# Altium PCB BMS.PcbDoc (part 2 of 2)
Units mil, origin at the board's own origin, x right, y up, seen from the top; angles counter-clockwise.
Board outline 4370 x 2340 mil, 2 copper layers (Top Layer, Bottom Layer); 173 components, 136 nets, 585 pads, 275 vias.
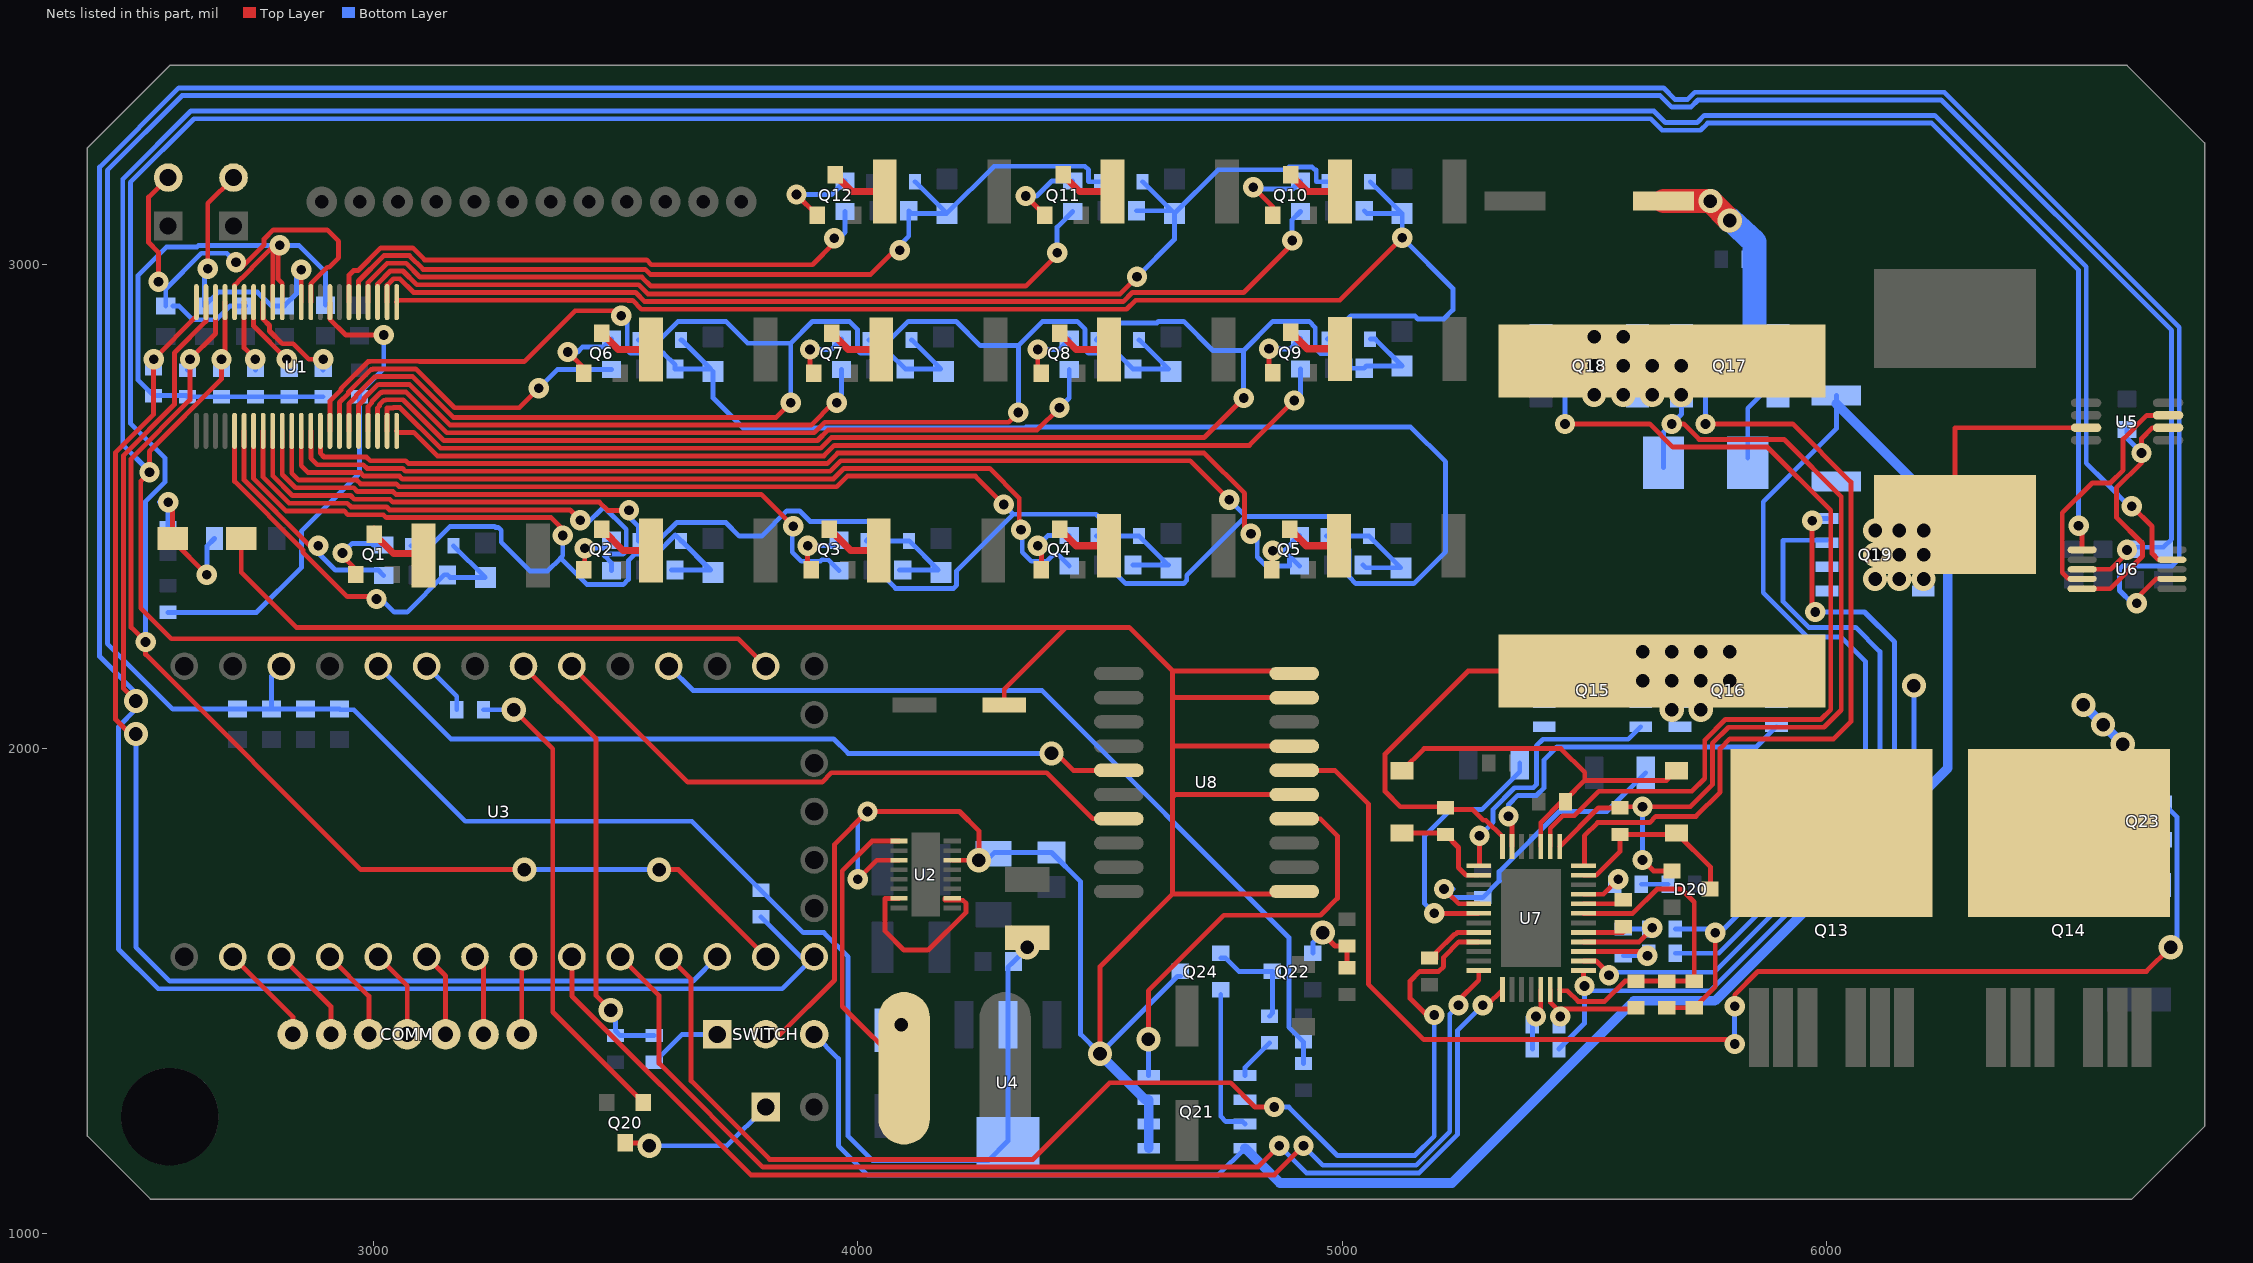
[diagram p2: the nets of this part, all layers, seen from the top]

## Via types
v1: diameter 50, hole 28, Top Layer to Bottom Layer, 130 vias
v2: diameter 42, hole 20, Top Layer to Bottom Layer, 130 vias
v3: diameter 23.62, hole 11.81, Top Layer to Bottom Layer, 15 vias

## Nets (pads, with @x,y where several pads share a name; then routed paths per layer and width w, separated by ;. In a path a pad name is that pad's centre, name@x,y a point inside that pad or via, vN(x,y) a via of type N, cw(c..) or ccw(c..) an arc to the next point about the centre after c; other vN are vias at no path point) (continued)
NetC6_2: C6.2 D5.1 R14.1 U1.5 | length 862.9
  Top Layer w10: U1.5@2713.62,2655.71 2713.62,2551.54 2854.66,2410.49 2854.66,2405.37 2946.45,2313.58 3001.57,2313.58 v2(3006.57,2308.58)
  Bottom Layer w10: v2(3006.57,2308.58) 3016.45,2308.58 3043.35,2281.68 3069.79,2281.68 3146.69,2358.58 R14.1@3153.07,2358.58 3158.5,2353.15 3230.9,2353.15 D5.1@3165.47,2418.58
NetC7_2: C7.2 D5.2 D6.1 R16.1 U1.7 | length 1738
  Top Layer w10: U1.7@2752.99,2655.71 2752.99,2557.19 2819.69,2490.49 2939.79,2490.49 2947.6,2482.68 3021.01,2482.68 3026.87,2476.81 3367.43,2476.81 3391.19,2453.05 v2(3391.19,2439.77)
  Bottom Layer w10: D5.2@3077.67,2418.58 3118.52,2418.58 3158.48,2458.54 3250.58,2458.54 3252.55,2456.58 3257.74,2456.58 3264.13,2450.19 3264.13,2425.9 3323.35,2366.68 3360.06,2366.68 3386.57,2393.18 ; v2(3391.19,2439.77) 3391.19,2397.81 3386.57,2393.18 ; R16.1@3615.68,2368.58 R16.1@3623.07,2368.58 3696.14,2368.58 3636.14,2428.58 D6.1@3635.47,2428.58 3623.24,2440.81 3583.77,2401.34 3540.01,2401.34 3526.57,2387.9 3526.57,2349.26 3515.77,2338.46 3441.29,2338.46 3386.57,2393.18
NetC8_2: C8.2 D6.2 D7.1 R18.1 U1.9 | length 1727.4
  Top Layer w10: U1.9@2792.36,2655.71 2792.36,2562.81 2832.87,2522.3 2952.96,2522.3 2960.77,2514.49 3034.18,2514.49 3040.05,2508.62 3466.65,2508.62 3483.61,2491.66 v2(3527.94,2491.66)
  Bottom Layer w10: v2(3527.94,2491.66) 3527.94,2477.22 3547.67,2457.48 D6.2@3547.67,2428.58 3588.52,2428.58 3626.51,2466.58 3727.74,2466.58 3755.73,2438.58 3801.45,2438.58 3853.35,2490.49 3879.79,2490.49 3901.69,2468.58 4024.62,2468.58 4064.62,2428.58 D7.1@4105.47,2428.58 4106.14,2428.58 4166.14,2368.58 R18.1@4093.07,2368.58 R18.1@4085.68,2368.58
NetC9_2: C9.2 D7.2 D8.1 R20.1 U1.11 | length 2544.1
  Top Layer w10: U1.11@2831.73,2655.71 2831.73,2568.43 2846.04,2554.11 2966.14,2554.11 2973.95,2546.3 3047.36,2546.3 3053.23,2540.43 3956.46,2540.43 3978.28,2562.24 4242.91,2562.24 v2(4301.57,2503.58)
  Bottom Layer w10: D7.2@4025.68,2428.58 D7.2@4017.67,2428.58 4027.67,2438.58 4032.13,2438.58 4061.57,2409.14 4061.57,2347.25 4078.23,2330.59 4197.74,2330.59 4204.13,2336.98 4204.13,2366.74 4320.97,2483.58 ; v2(4301.57,2503.58) 4301.57,2502.98 4320.97,2483.58 ; R20.1@4568.07,2378.58 4641.14,2378.58 4581.14,2438.58 D8.1@4580.47,2438.58 4536.84,2438.58 4491.84,2483.58 4320.97,2483.58
NetC10_2: C10.2 D8.2 D9.1 R22.1 U1.13 | length 2945.2
  Top Layer w10: U1.13@2871.1,2655.71 2871.1,2599.06 2884.23,2585.92 2979.31,2585.92 2987.13,2578.11 3060.54,2578.11 3066.4,2572.24 3943.29,2572.24 3965.1,2594.06 4686.1,2594.06 v2(4766.57,2513.58)
  Bottom Layer w10: D8.2@4492.67,2438.58 4514.34,2438.58 4514.34,2422.14 4533.7,2402.79 4533.7,2360.13 4553.23,2340.59 4672.74,2340.59 4679.13,2346.98 4679.13,2357.58 4800.85,2479.3 ; v2(4766.57,2513.58) 4800.85,2479.3 ; R22.1@5043.07,2378.58 5048.5,2373.15 5120.9,2373.15 D9.1@5055.47,2438.58 5011.84,2438.58 4971.12,2479.3 4800.85,2479.3
NetC11_2: C11.2 D9.2 D10.1 R24.1 U1.15 | length 3255.6
  Top Layer w10: U1.15@2910.47,2655.71 2910.47,2717.09 2933.14,2739.77 2933.14,2742.68 2989.05,2798.58 2991.96,2798.58 2992.83,2799.45 3094.35,2799.45 3095.21,2798.58 3311.57,2798.58 3416.57,2903.58 3501.57,2903.58 v2(3511.57,2893.58)
  Bottom Layer w10: v2(3511.57,2893.58) 3524.37,2880.79 3524.37,2822.73 3530.75,2816.34 3598.81,2816.34 3623.07,2792.09 R24.1@3623.07,2783.58 3696.14,2783.58 3636.14,2843.58 D10.1@3635.47,2843.58 ; C11.2@3701.57,2778.15 3701.57,2723.58 3763.48,2661.68 4344.79,2661.68 4346.69,2663.58 5141.57,2663.58 5213.48,2591.68 5213.48,2406.33 5147.74,2340.59 5028.23,2340.59 5014.44,2354.38 5014.44,2410.71 4986.62,2438.53 4967.72,2438.53 D9.2@4967.67,2438.58
NetC12_2: C12.2 D10.2 D11.1 R26.1 U1.17 | length 1990.1
  Top Layer w10: U1.17@2949.84,2655.71 2949.84,2711.47 2964.96,2726.59 2964.96,2729.5 3002.23,2766.77 3005.14,2766.77 3006,2767.64 3081.17,2767.64 3165.23,2683.58 3831.57,2683.58 v2(3861.57,2713.58)
  Bottom Layer w10: D10.2@3547.67,2843.58 3591.3,2843.58 3629.3,2881.58 3727.74,2881.58 3772.74,2836.58 3861.57,2836.58 ; v2(3861.57,2713.58) 3861.57,2836.58 ; D11.1@4110.47,2843.58 4111.14,2843.58 4171.14,2783.58 R26.1@4098.07,2783.58 4065.31,2816.34 4005.75,2816.34 3999.37,2822.73 3999.37,2865.11 3982.9,2881.58 3906.57,2881.58 3861.57,2836.58
NetC13_2: C13.2 D11.2 D12.1 R28.1 U1.19 | length 2423.3
  Top Layer w10: U1.19@2989.21,2655.71 2989.21,2705.85 2996.77,2713.41 2996.77,2716.33 3015.4,2734.96 3018.32,2734.96 3019.18,2735.83 3067.99,2735.83 3152.05,2651.77 3910.35,2651.77 3932.16,2673.58 4311.57,2673.58 v2(4331.57,2693.58)
  Bottom Layer w10: D11.2@4022.67,2843.58 4066.3,2843.58 4104.3,2881.58 4202.74,2881.58 4252.74,2831.58 4331.57,2831.58 ; v2(4331.57,2693.58) 4331.57,2831.58 ; D12.1@4580.47,2843.58 4581.14,2843.58 4641.14,2783.58 R28.1@4568.07,2783.58 4535.31,2816.34 4475.75,2816.34 4469.37,2822.73 4469.37,2865.11 4452.9,2881.58 4381.57,2881.58 4331.57,2831.58
NetC14_2: C14.2 D12.2 D13.1 R30.1 U1.21 | length 2855.5
  Top Layer w10: U1.21@3028.58,2655.71 3028.58,2703.15 3040.84,2703.15 3041.71,2704.02 3054.82,2704.02 3138.87,2619.96 3923.52,2619.96 3945.33,2641.77 4714.76,2641.77 v2(4796.57,2723.58)
  Bottom Layer w10: D12.2@4492.67,2843.58 4526.57,2877.48 4526.57,2878.58 4617.41,2878.58 4620.4,2881.58 4672.74,2881.58 4732.74,2821.58 4796.57,2821.58 ; v2(4796.57,2723.58) 4796.57,2821.58 ; D13.1@5057.75,2845 5068.42,2845 C14.2@5123.85,2789.57 5049.92,2789.57 R30.1@5045.35,2785 5016.57,2785 5016.57,2803.61 5004.59,2815.59 4955.2,2815.59 4944.44,2826.35 4944.44,2868.73 4931.6,2881.58 4856.57,2881.58 4796.57,2821.58
NetC15_2: C15.2 D13.2 D14.1 R32.1 U1.23 | length 2850
  Top Layer w10: U1.23@3048.26,2921.46 3052.29,2925.49 3524.79,2925.49 3525.31,2924.96 3535.31,2924.96 3553.5,2906.77 4554.75,2906.77 4573.46,2925.49 4995.15,2925.49 v2(5123.85,3054.19)
  Bottom Layer w10: D13.2@4969.96,2845 5017.95,2892.99 5150.02,2892.99 5156.34,2886.68 5209.79,2886.68 5228.48,2905.37 5228.48,2949.57 v2(5123.85,3054.19) C15.2@5123.85,3104.57 ; R32.1@5045.35,3110 5050.78,3104.57 5123.18,3104.57 D14.1@5057.75,3170
NetC16_2: C16.2 D14.2 D15.1 R34.1 U1.25 | length 2354.7
  Top Layer w10: U1.25@3008.89,2921.46 3008.89,2959.44 3035.12,2985.67 3061.41,2985.67 3089.78,2957.3 3547.96,2957.3 3566.68,2938.58 4541.57,2938.58 v2(4576.57,2973.58)
  Bottom Layer w10: R34.1@4575.35,3110 4648.42,3110 4588.42,3170 D15.1@4587.75,3170 ; v2(4576.57,2973.58) 4653.85,3050.87 C16.2@4653.85,3104.57 4743.83,3194.55 4884.08,3194.55 4889.65,3200.12 4938.06,3200.12 4943.63,3194.55 4946.41,3194.55 4946.41,3170 D14.2@4969.96,3170
NetC17_2: C17.2 D15.2 D16.1 R36.1 U1.27 | length 1866.5
  Top Layer w10: U1.27@2969.52,2921.46 2969.52,2965.06 3021.94,3017.48 3074.58,3017.48 3102.95,2989.11 3561.14,2989.11 3571.67,2978.58 4026.57,2978.58 4076.57,3028.58 v2(4086.57,3028.58)
  Bottom Layer w10: v2(4086.57,3028.58) 4086.57,3038.58 4105.35,3057.36 R36.1@4105.35,3110 4110.78,3104.57 C17.2@4183.85,3104.57 ; D16.1@4117.75,3170 4118.42,3170 C17.2@4183.85,3104.57 ; D15.2@4499.96,3170 4476.41,3170 4476.41,3194.55 4468.87,3202.09 4281.37,3202.09 C17.2@4183.85,3104.57
NetC32_1: C32.1 D3.1 U7.2 | length 218.9
  Top Layer w10: D3.1@5123.31,1825.63 5210.12,1825.63 C32.1@5213.31,1822.44 5240,1795.75 5240,1754.07 5255.48,1738.58 U7.2@5281.73,1738.58
NetC32_2: C32.2 L3.1 Q15.1 Q16.3 U7.38 | length 1020.9
  Top Layer w10: U7.38@5330.94,1797.64 5330.94,1817.48 5296.52,1851.91 5291.4,1851.91 5269.21,1874.09 5216.77,1874.09 C32.2@5213.31,1877.56 5210.87,1880 5120,1880 5088.39,1911.61 5088.39,1988.39 5260,2160 L3.1@5660,2160
  other v1: 5680,2080 5740,2080 5620,2140 5680,2140 5740,2140 5800,2140 5620,2200 5680,2200 5740,2200 5800,2200
NetC34_1: C34.1 Q16.1 R53.2 U7.5 | length 645.7
  Top Layer w10: v2(5210,1710) 5240.47,1679.53 U7.5@5281.73,1679.53
  Bottom Layer w10: v2@5229.13,1710 v2(5210,1710) 5227.56,1692.44 C34.1@5290,1692.44 5324.37,1726.81 5323.98,1727.2 5323.98,1746.02 5447.95,1870 5546.46,1870 R53.2@5626.46,1950
NetC35_2: C35.2 D3.2 D19.2 U7.34 | length 809.9
  Top Layer w10: D3.2@5123.31,1954.37 5168.94,2000 5451.5,2000 5500.75,1950.75 5500.75,1934.37 ; U7.34@5409.69,1797.64 5409.69,1847.02 5452.67,1890 C35.2@5460.87,1890 5460.87,1894.49 5500.75,1934.37 ; D19.2@5690,1954.37 5670,1934.37 5500.75,1934.37
NetC36_1: C36.1 U7.24 | length 81.3
  Top Layer w10: U7.24@5498.27,1620.47 C36.1@5579.53,1620.47
NetC36_2: C36.2 U7.27 | length 89.8
  Top Layer w10: U7.27@5498.27,1679.53 5580,1679.53 C36.2@5580,1687.56
NetC37_1: C37.1 R54.2 | length 54.9
  Bottom Layer w10: R54.2@5617.56,1720 C37.1@5672.44,1720
NetC38_1: C38.1 R59.1 U7.22 | length 189.7
  Top Layer w10: U7.22@5498.27,1581.1 5628.9,1581.1 5630,1580 v2(5630,1572.44)
  Bottom Layer w10: C38.1@5580,1572.44 v2(5630,1572.44)
NetC38_2: C38.2 R58.1 U7.23 | length 225.2
  Top Layer w10: U7.23@5498.27,1600.79 5613.23,1600.79 5640,1627.56 v2(5640,1629.94)
  Bottom Layer w10: C38.2@5580,1627.56 5644.49,1627.56 5642.1,1629.94 v2(5640,1629.94)
NetC39_1: C39.1 R56.2 R57.1 U7.19 U7.26 | length 721.1
  Top Layer w10: U7.19@5449.06,1502.36 5451.42,1500 5464.88,1500 5486.78,1478.09 5541.85,1478.09 5583.75,1520 R56.2@5606.69,1520 R57.1@5670,1520 C39.1@5726.69,1520 ; U7.26@5498.27,1659.84 5599.84,1659.84 5650,1710 5700,1710 5726.69,1683.31 C39.1@5726.69,1527.56
NetC40_1: C40.1 D19.1 D20.3 U7.30 | length 394.5
  Top Layer w10: U7.30@5498.27,1738.58 5524.52,1738.58 5573.31,1787.37 C40.1@5573.31,1822.44 5693.19,1822.44 5760,1755.63 5760,1720 D20.3@5750,1710
NetC40_2: C40.2 D4.2 D20.1 L3.2 Q17.1 Q18.3 U7.32 | length 1970.9
  Top Layer w10: U7.32@5449.06,1797.64 5528.98,1877.56 C40.2@5573.31,1877.56 5575.75,1880 v2(5620,1880) 5718.78,1880 5764.09,1925.31 5764.09,2010.82 5797.37,2044.09 5994.51,2044.09 6030,2079.58 6030,2520 5911.91,2638.09 5736.78,2638.09 5704.88,2670 v2(5680,2670) ; v2(5620,1770) 5642.6,1747.4 D20.1@5670.63,1747.4
  Bottom Layer w10: v2(5620,1770) v2(5620,1880) ; D4.2@5662.99,2580 D4.2@5662.99,2590 5662.99,2652.99 v2(5680,2670) 5700.49,2690.49 Q17.1@5700.49,2715 Q17.1@5700.49,2765
  other v1: 5520,2730 5580,2730 5640,2730 5700,2730 5520,2790 5580,2790 5640,2790 5700,2790 5520,2850 5580,2850
NetD1_1: D1.1 L1.2 R10.2 | length 341.9
  Top Layer w10: v2(2576.57,2508.58) 2585.7,2499.45 L1.2@2585.7,2433.58 2585.7,2429.45 v2(2656.57,2358.58)
  Bottom Layer w10: R10.2@2576.57,2456.14 2576.57,2491.02 2559.01,2508.58 v2(2576.57,2508.58) ; v2(2656.57,2358.58) 2656.57,2417.95 D1.1@2672.2,2433.58
NetD2_2: D2.2 L2.1 U2.1 | length 612.8
  Top Layer w10: U2.1@4085.08,1808.9 4029.41,1808.9 3968.09,1747.58 3968.09,1467.57 L2.1@4095.67,1340 L2.1@4095.67,1330
  other v1: 4090,1430
NetJP2_1: COMM.1 U3.6 | length 161.5
  Top Layer w10: COMM.1@3306.48,1410 3306.48,1566.48 U3.6@3310,1570
NetJP2_2: COMM.2 U3.5 | length 167.3
  Top Layer w10: U3.5@3210,1570 3227.74,1552.26 COMM.2@3227.74,1410
NetJP2_3: COMM.3 U3.4 | length 176.2
  Top Layer w10: U3.4@3110,1570 3149,1531 COMM.3@3149,1410
NetJP2_4: COMM.4 U3.3 | length 184.9
  Top Layer w10: U3.3@3010,1570 3070,1510 COMM.4@3070,1410
NetJP2_5: COMM.5 U3.2 | length 193.6
  Top Layer w10: U3.2@2910,1570 2991,1489 COMM.5@2991,1410
NetJP2_6: COMM.6 U3.1 | length 202.6
  Top Layer w10: U3.1@2810,1570 2912.78,1467.22 COMM.6@2912.78,1410
NetJP2_7: COMM.7 U3.0 | length 211.4
  Top Layer w10: U3.0@2710,1570 2834.04,1445.96 COMM.7@2834.04,1410
NetP3_1: R62.2 SWITCH.1 | length 149.7
  Bottom Layer w10: R62.2@3590,1352.44 3590,1362.44 3637.56,1410 SWITCH.1@3710,1410
NetQ1_1: Q1.1 R15.2 | length 145
  Top Layer w10: v2@2936.57,2396.81 2965.68,2367.7 2965.68,2360.73 Q1.1@2964.17,2359.21
  Bottom Layer w10: v2(2936.57,2403.58) 2956.57,2423.58 2996.57,2423.58 3000.07,2420.08 R15.2@3021.57,2420.08
NetQ1_2: Q1.2 R38.2 | length 132.5
  Top Layer w15: Q1.2@3001.57,2452.58 Q1.2@3001.57,2442.58 3041.57,2402.59 3103.46,2402.59 R38.2@3103.46,2398.58
NetQ2_1: Q2.1 R17.2 | length 113.5
  Top Layer w10: Q2.1@3434.17,2369.21 3426.57,2376.81 3436.57,2386.81 v2(3436.57,2413.58)
  Bottom Layer w10: v2(3436.57,2413.58) 3475.07,2413.58 R17.2@3491.57,2430.08
NetQ2_2: Q2.2 R39.2 | length 120.1
  Top Layer w15: Q2.2@3471.57,2452.58 3515.57,2408.58 R39.2@3573.46,2408.58
NetQ3_1: Q3.1 R19.2 | length 122.3
  Top Layer w10: v2(3896.57,2418.58) 3896.57,2376.81 Q3.1@3904.17,2369.21
  Bottom Layer w10: v2(3896.57,2418.58) 3950.07,2418.58 R19.2@3961.57,2430.08
NetQ3_2: Q3.2 R40.2 | length 120.1
  Top Layer w15: Q3.2@3941.57,2452.58 3985.57,2408.58 R40.2@4043.46,2408.58
NetQ4_1: Q4.1 R21.2 | length 126.4
  Top Layer w10: v2(4371.57,2418.58) 4379.17,2410.98 Q4.1@4379.17,2369.21
  Bottom Layer w10: v2(4371.57,2418.58) 4393.07,2440.08 R21.2@4436.57,2440.08
NetQ4_2: Q4.2 R41.2 | length 116
  Top Layer w15: Q4.2@4416.57,2452.58 4450.57,2418.58 R41.2@4518.46,2418.58
NetQ5_1: Q5.1 R23.2 | length 114.7
  Top Layer w10: Q5.1@4854.17,2369.21 4846.57,2376.81 4856.57,2386.81 v2(4856.57,2408.58)
  Bottom Layer w10: v2(4856.57,2408.58) 4880.07,2408.58 R23.2@4911.57,2440.08
NetQ5_2: Q5.2 R42.2 | length 116
  Top Layer w15: Q5.2@4891.57,2452.58 4925.57,2418.58 R42.2@4993.46,2418.58
NetQ6_1: Q6.1 R25.2 | length 158.8
  Top Layer w10: v2(3401.57,2818.58) 3434.17,2785.98 Q6.1@3434.17,2774.21
  Bottom Layer w10: v2(3401.57,2818.58) 3421.57,2818.58 3431.57,2828.58 3475.07,2828.58 R25.2@3491.57,2845.08
NetQ6_2: Q6.2 R43.2 | length 116
  Top Layer w15: Q6.2@3471.57,2857.58 3505.57,2823.58 R43.2@3573.46,2823.58
NetQ7_1: Q7.1 R27.2 | length 126.4
  Top Layer w10: v2(3901.57,2823.58) 3901.57,2781.81 Q7.1@3909.17,2774.21
  Bottom Layer w10: v2(3901.57,2823.58) 3945.07,2823.58 R27.2@3966.57,2845.08
NetQ7_2: Q7.2 R44.2 | length 116
  Top Layer w15: Q7.2@3946.57,2857.58 3980.57,2823.58 R44.2@4048.46,2823.58
NetQ8_1: Q8.1 R29.2 | length 126.4
  Top Layer w10: v2(4371.57,2823.58) 4371.57,2781.81 Q8.1@4379.17,2774.21
  Bottom Layer w10: v2(4371.57,2823.58) 4415.07,2823.58 R29.2@4436.57,2845.08
NetQ8_2: Q8.2 R45.2 | length 116
  Top Layer w15: Q8.2@4416.57,2857.58 4450.57,2823.58 R45.2@4518.46,2823.58
NetQ9_1: Q9.1 R31.2 | length 126.4
  Top Layer w10: v2(4848.85,2825) 4848.85,2783.23 Q9.1@4856.45,2775.63
  Bottom Layer w10: v2(4848.85,2825) 4892.36,2825 R31.2@4913.85,2846.5
NetQ9_2: Q9.2 R46.2 | length 116
  Top Layer w15: Q9.2@4893.85,2859 4927.85,2825 R46.2@4995.74,2825
NetQ10_1: Q10.1 R33.2 | length 180.1
  Top Layer w10: v2(4816.57,3158.58) 4856.45,3118.7 Q10.1@4856.45,3100.63
  Bottom Layer w10: v2(4816.57,3158.58) 4820.15,3155 4897.36,3155 R33.2@4913.85,3171.5
NetQ10_2: Q10.2 R47.2 | length 116
  Top Layer w15: Q10.2@4893.85,3184 4927.85,3150 R47.2@4995.74,3150
NetQ11_1: Q11.1 R35.2 | length 166.5
  Top Layer w10: v2(4346.57,3140.51) Q11.1@4386.45,3100.63
  Bottom Layer w10: v2(4346.57,3140.51) 4369.37,3140.51 4400.35,3171.5 R35.2@4443.85,3171.5
NetQ11_2: Q11.2 R48.2 | length 116
  Top Layer w15: Q11.2@4423.85,3184 4457.85,3150 R48.2@4525.74,3150
NetQ12_1: Q12.1 R37.2 | length 172.7
  Top Layer w10: v2(3873.5,3143.58) Q12.1@3916.45,3100.63
  Bottom Layer w10: v2(3873.5,3143.58) 3945.94,3143.58 R37.2@3973.85,3171.5
NetQ12_2: Q12.2 R49.2 | length 116
  Top Layer w15: Q12.2@3953.85,3184 3987.85,3150 R49.2@4055.74,3150
NetQ15_1: Q15.2 U7.1 | length 551
  Top Layer w10: U7.1@5281.73,1758.27 5283.31,1759.84 v2(5283.31,1820)
  Bottom Layer w10: v2(5283.31,1820) 5311.4,1848.09 5311.4,1874.82 5355.67,1919.09 5394.52,1919.09 5400.91,1925.48 5400.91,2005.48 5414.52,2019.09 5590.3,2019.09 Q15.2@5616.2,2045
NetQ15_2: Q15.3 R52.1 U7.6 | length 540.4
  Top Layer w10: v2@5193.31,1650 5190,1653.31 v2(5190,1660) 5190.16,1659.84 U7.6@5281.73,1659.84
  Bottom Layer w10: v2(5190,1660) 5170,1680 5170,1820 5224.09,1874.09 5288.18,1874.09 5366.46,1952.37 R52.1@5366.46,1970
NetQ16_1: Q16.2 U7.37 | length 743
  Top Layer w10: v2(5343.31,1860) 5350.63,1852.68 U7.37@5350.63,1797.64
  Bottom Layer w10: v2(5343.31,1860) 5343.31,1884.23 5362.26,1903.19 5401.11,1903.19 5416.81,1918.89 5416.81,1976.81 5443.19,2003.19 5854.39,2003.19 Q16.2@5896.2,2045
NetQ17_1: Q17.2 U7.31 | length 1836.8
  Top Layer w10: U7.31@5498.27,1758.27 5500,1760 5500,1820 5527.13,1847.13 5634.69,1847.13 5647.56,1860 5730,1860 5780,1910 5780,2000 5800,2020 6014.58,2020 6050,2055.42 6050,2550 5930,2670 v2(5750,2670)
  Bottom Layer w10: Q17.2@5700.49,2865 5725,2865 5750,2840 v2(5750,2670)
NetQ18_1: Q18.2 U7.33 | length 2027.9
  Top Layer w10: U7.33@5429.37,1797.64 5429.37,1835.22 5455.53,1861.38 5479.16,1861.38 5529.69,1911.91 5721.91,1911.91 5748.19,1938.19 5748.19,2017.41 5790.78,2060 5987.92,2060 6008.41,2080.48 6008.41,2491.59 5877.81,2622.19 5682.69,2622.19 5634.88,2670 v2(5460,2670)
  Bottom Layer w10: Q18.2@5410.49,2865 5435,2865 5460,2840 v2(5460,2670)
NetQ19_1: Q19.2 U7.21 | length 1534.6
  Top Layer w10: U7.21@5498.27,1561.42 5524.52,1561.42 5550.76,1535.17 v2(5550.76,1532.13) ; v2(5970,2470) 5970,2288.41 v2(5976.5,2281.91)
  Bottom Layer w10: v2(5550.76,1532.13) 5556.73,1538.09 5767.97,1538.09 6140,1910.12 6140,2220 6078.09,2281.91 v2(5976.5,2281.91) ; v2(5970,2470) 5975,2475 Q19.2@6000.49,2475
NetQ19_3: Q19.1 R59.2 R61.1 | length 1310.1
  Bottom Layer w10: R59.2@5687.56,1577.56 5777.56,1577.56 6110,1910 6110,2200 6060,2250 5989.72,2250 5963.28,2250 5910,2303.28 5910,2430 Q19.1@6000.49,2430
NetQ20_1: Q20.1 R63.2 | length 983.8
  Top Layer w10: v1(3290,2080) 3370.59,1999.41 3370.59,1456.18 Q20.1@3557.4,1269.37
  Bottom Layer w10: R63.2@3227.56,2080 v1(3290,2080)
NetQ22_1: Q22.1 R65.1 R66.2 | length 158.9
  Top Layer w10: v1(4960,1620) 4960,1617.56 4985.12,1592.44 R65.1@5010,1592.44 R66.2@5010,1547.56
  Bottom Layer w10: Q22.1@4939.37,1577.4 4939.37,1599.37 v1(4960,1620)
NetQ22_2: Q22.2 Q24.1 R67.1 | length 212.9
  Bottom Layer w10: Q24.1@4749.37,1567.4 4759.37,1567.4 4786.77,1540 Q22.2@4856,1540 4856,1453.56 R67.1@4850,1447.56
NetQ23_3: Q23.3 R68.2 | length 118.3
  Bottom Layer w20: R68.2@6645,1714.17 6694.37,1763.54 Q23.3@6694.37,1812
NetR3_2: R3.2 U1.44 U3.10 | length 2694.4
  Top Layer w10: v1(2510,2030) 2498.19,2030 2468.19,2060 2468.19,2611.36 2546.57,2689.75 v2(2546.57,2803.58) 2634.88,2891.89 U1.44@2634.88,2921.46
  Bottom Layer w10: v1(2510,2030) 2510,1590 2580,1520 3660,1520 U3.10@3710,1570 ; R3.2@2546.57,2783.58 v2(2546.57,2803.58)
NetR5_1: R5.1 U7.8 | length 119
  Top Layer w10: R5.1@5193.31,1565.12 5193.31,1578.19 5231.74,1616.61 5234.12,1616.61 5237.98,1620.47 U7.8@5281.73,1620.47
NetR11_2: R11.2 U1.39 | length 150
  Top Layer w10: U1.39@2733.3,2921.46 2733.3,2826.85 v2(2756.57,2803.58)
  Bottom Layer w10: R11.2@2756.57,2781.14 v2(2756.57,2803.58)
NetR12_2: R12.2 U1.37 | length 222.4
  Top Layer w10: U1.37@2772.67,2921.46 2772.67,2886.28 2785.8,2873.15 2785.8,2861.84 2812.16,2835.49 2834.79,2835.49 2866.69,2803.58 v2(2896.57,2803.58)
  Bottom Layer w10: R12.2@2896.57,2781.14 v2(2896.57,2803.58)
NetR13_2: R13.2 U1.38 | length 173.7
  Top Layer w10: U1.38@2752.99,2921.46 2752.99,2872.17 v2(2821.57,2803.58)
  Bottom Layer w10: v2(2821.57,2803.58) 2826.57,2803.58 R13.2@2826.57,2781.14
NetR15_1: R15.1 U1.6 | length 480.1
  Top Layer w10: U1.6@2733.38,2655.71 2733.38,2554.3 2869.1,2418.58 v2(2886.57,2418.58)
  Bottom Layer w10: v2(2886.57,2418.58) 2886.57,2403.58 2921.57,2368.58 3010.07,2368.58 R15.1@3021.57,2357.09
NetR17_1: R17.1 U1.8 | length 1048.6
  Top Layer w10: U1.8@2772.67,2655.71 2772.67,2560 2826.28,2506.39 2946.37,2506.39 2954.18,2498.58 3027.6,2498.58 3033.46,2492.72 3406,2492.72 v2(3427.22,2471.49)
  Bottom Layer w10: v2(3427.22,2471.49) 3432.99,2471.49 3440.89,2463.58 3475.89,2498.58 3522.16,2452.31 3522.16,2407.85 3515.77,2401.46 3485.44,2401.46 3481.66,2397.68 3477.48,2397.68 3491.57,2383.58 R17.1@3491.57,2367.09
NetR19_1: R19.1 U1.10 | length 1358.3
  Top Layer w10: U1.10@2812.04,2655.71 2812.04,2565.62 2839.45,2538.2 2959.55,2538.2 2967.36,2530.39 3040.77,2530.39 3046.64,2524.53 3800.62,2524.53 v2(3866.57,2458.58)
  Bottom Layer w10: v2(3866.57,2458.58) 3864.66,2456.68 3864.66,2405.37 3883.35,2386.68 3922.85,2386.68 3925.98,2389.8 3938.85,2389.8 R19.1@3961.57,2367.09
NetR21_1: R21.1 U1.12 | length 1833.3
  Top Layer w10: U1.12@2851.41,2655.71 2851.41,2583.74 2865.14,2570.02 2972.73,2570.02 2980.54,2562.2 3053.95,2562.2 3059.82,2556.34 3949.88,2556.34 3971.69,2578.15 4272.12,2578.15 4333.48,2516.8 4333.48,2455.12 v2(4336.92,2451.68)
  Bottom Layer w10: v2(4336.92,2451.68) 4339.66,2448.93 4339.66,2405.37 4358.35,2386.68 4390.35,2386.68 4403.48,2399.8 4413.85,2399.8 R21.1@4436.57,2377.09
NetR23_1: R23.1 U1.14 | length 2272.3
  Top Layer w10: U1.14@2890.78,2655.71 2890.78,2609.37 2898.33,2601.83 2985.9,2601.83 2993.71,2594.02 3067.13,2594.02 3072.99,2588.15 3936.7,2588.15 3958.51,2609.96 4715.31,2609.96 4798.48,2526.8 4798.48,2456.68 v2(4811.57,2443.58)
  Bottom Layer w10: v2(4811.57,2443.58) 4824.66,2430.49 4824.66,2395.37 4843.35,2376.68 4891.32,2376.68 4891.32,2397.34 R23.1@4911.57,2377.09
NetR25_1: R25.1 U1.16 | length 716
  Top Layer w10: U1.16@2930.15,2655.71 2930.15,2714.28 2949.05,2733.18 2949.05,2736.09 2995.64,2782.68 2998.55,2782.68 2999.42,2783.54 3087.76,2783.54 3167.72,2703.58 3301.57,2703.58 v2(3341.57,2743.58)
  Bottom Layer w10: v2(3341.57,2743.58) 3380.07,2782.09 R25.1@3491.57,2782.09
NetR27_1: R27.1 U1.18 | length 1187.6
  Top Layer w10: U1.18@2969.52,2655.71 2969.52,2708.66 2980.86,2720 2980.86,2722.91 3008.81,2750.87 3011.73,2750.87 3012.59,2751.73 3074.58,2751.73 3158.64,2667.68 3903.76,2667.68 3949.66,2713.58 v2(3956.57,2713.58)
  Bottom Layer w10: v2(3956.57,2713.58) 3956.57,2716.68 3954.66,2718.58 3966.57,2730.49 R27.1@3966.57,2782.09
NetR29_1: R29.1 U1.20 | length 1613.4
  Top Layer w10: U1.20@3008.89,2655.71 3008.89,2703.05 3012.67,2706.82 3012.67,2709.74 3021.99,2719.06 3024.9,2719.06 3025.77,2719.92 3061.41,2719.92 3145.46,2635.87 3916.94,2635.87 3938.75,2657.68 4370.66,2657.68 v2(4416.57,2703.58)
  Bottom Layer w10: v2(4416.57,2703.58) 4436.57,2723.58 R29.1@4436.57,2782.09
NetR31_1: R31.1 U1.22 | length 1991.8
  Top Layer w10: U1.22@3048.26,2655.71 3051.29,2652.68 3083.66,2652.68 3132.29,2604.06 3930.11,2604.06 3951.92,2625.87 4808.3,2625.87 v2(4900.95,2718.51)
  Bottom Layer w10: v2(4900.95,2718.51) 4913.85,2731.42 R31.1@4913.85,2783.5
NetR33_1: R33.1 U1.24 | length 2051.6
  Top Layer w10: U1.24@3028.58,2921.46 3028.58,2956.63 3041.71,2969.76 3054.82,2969.76 3083.19,2941.39 3541.37,2941.39 3560.09,2922.68 4548.16,2922.68 4566.87,2941.39 4796.57,2941.39 4896.57,3041.39 v2(4896.57,3048.58)
  Bottom Layer w10: v2(4896.57,3048.58) 4896.57,3091.22 R33.1@4913.85,3108.5
NetR35_1: R35.1 U1.26 | length 1628.3
  Top Layer w10: U1.26@2989.21,2921.46 2989.21,2962.25 3028.53,3001.57 3067.99,3001.57 3096.36,2973.2 3554.55,2973.2 3573.27,2954.49 4346.57,2954.49 4411.57,3019.49 v2(4411.57,3023.58)
  Bottom Layer w10: v2(4411.57,3023.58) 4411.57,3076.22 R35.1@4443.85,3108.5
NetR37_1: R37.1 U1.28 | length 1193.8
  Top Layer w10: U1.28@2949.84,2921.46 2949.84,2977.22 2959.3,2986.68 2968.65,2986.68 3015.35,3033.39 3081.17,3033.39 3105.97,3008.58 3564.16,3008.58 3574.16,2998.58 3906.57,2998.58 3951.57,3043.58 v2(3951.57,3053.58)
  Bottom Layer w10: v2(3951.57,3053.58) 3961.57,3053.58 3973.85,3065.87 R37.1@3973.85,3108.5
NetR50_1: R50.1 R51.2 U3.16/A2 | length 1784.4
  Bottom Layer w10: U3.16/A2@3610,2170 3660,2120 4380,2120 4890,1610 4890,1424.88 R50.1@4920,1394.88 R51.2@4920,1350
NetR54_1: R54.1 U7.28 | length 84.5
  Top Layer w10: U7.28@5498.27,1699.21 5539.21,1699.21 v2(5570,1730)
NetR55_1: R55.1 R56.1 U7.18 | length 241.3
  Top Layer w10: U7.18@5429.37,1502.36 5429.37,1476.11 5450,1455.48 v2(5450,1446.91) ; v2@5450,1462.19 5606.69,1462.19 R56.1@5606.69,1464.88
  Bottom Layer w10: R55.1@5447.56,1430 5447.56,1444.46 v2(5450,1446.91)
NetR55_2: R55.2 R60.1 U7.17 | length 135.7
  Top Layer w10: v2(5400,1446.91) 5400,1449.87 5409.69,1459.55 U7.17@5409.69,1502.36
  Bottom Layer w10: R60.1@5392.44,1380 R55.2@5392.44,1430 5392.44,1442.44 5400,1450 v2(5400,1446.91)
NetR63_1: R63.1 U3.21/A7 | length 115.9
  Bottom Layer w10: U3.21/A7@3110,2170 3172.44,2107.56 R63.1@3172.44,2080
NetU2_7: U2.7 U2.10 | length 395.2
  Top Layer w10: U2.7@4085.08,1690.79 4056.46,1690.79 4056.46,1622.77 4095.13,1584.09 4145.97,1584.09 4223.54,1661.66 4223.54,1680.54 4217.08,1687.01 4180.24,1687.01 4180.24,1690.79 U2.10@4194.92,1690.79
NetU3_7: U3.7 U7.12 | length 2472.9
  Top Layer w10: U3.7@3410,1570 3410,1489.22 3779.22,1120 4860,1120 v2(4920,1180) ; v2(5240,1470) 5240,1480 5281.73,1521.73 U7.12@5281.73,1541.73
  Bottom Layer w10: v2(4920,1180) 4960,1140 5152.49,1140 5221.91,1209.41 5221.91,1451.91 v2(5240,1470)
NetU3_8: U3.8 U7.13 | length 2406.8
  Top Layer w10: U3.8@3510,1570 3590,1490 3590,1350 3804.09,1135.91 4825.91,1135.91 v2(4870,1180) ; v2(5290,1470) 5298.58,1470 U7.13@5330.94,1502.36
  Bottom Layer w10: v2(4870,1180) 4925.91,1124.09 5159.08,1124.09 5237.81,1202.82 5237.81,1417.81 v2(5290,1470)
NetU3_9: U3.9 U7.9 | length 2556.9
  Top Layer w10: U3.9@3610,1570 3655.91,1524.09 3655.91,1314.09 3818.19,1151.81 4361.81,1151.81 4520,1310 4770,1310 4820,1260 v2(4860,1260) ; v2(5190,1450) 5174.27,1450 5140,1484.28 5140,1520 5160,1540 5199.36,1540 5209.21,1549.85 5209.21,1569.21 5240.79,1600.79 U7.9@5281.73,1600.79
  Bottom Layer w10: v2(4860,1260) 4890,1260 4990,1160 5150,1160 5190,1200 v2(5190,1450)
NetU5_7: U5.7 U6.3 | length 534.4
  Top Layer w10: U6.3@6527.38,2350.31 6498.92,2350.31 6486.36,2362.87 6486.36,2486.36 6548.09,2548.09 6585.6,2548.09 6611.91,2574.4 6611.91,2638.67 6661.03,2687.8 U5.7@6704.65,2687.8 U5.7@6730,2687.8
NTC1: C1.2 NTC1.2 R9.1 U1.32 | length 1060.6
  Top Layer w10: v2(2556.57,2963.58) 2556.57,3024.11 2536.14,3044.54 2536.14,3138.15 NTC1.2@2576.57,3178.58 ; v2@2723.07,2988.58 2774.79,3040.3 2774.79,3051.8 2793.48,3070.49 2904.79,3070.49 2928.48,3046.8 2928.48,3012.98 2908.82,2993.33 2904.98,2993.33 2871.1,2959.44 U1.32@2871.1,2921.46
  Bottom Layer w10: v2(2556.57,2963.58) 2571.57,2948.58 ; C1.2@2571.57,2913.58 2571.57,2948.58 ; C1.2@2586.57,2913.58 2598.75,2913.58 2627.37,2884.96 2675.77,2884.96 2704.39,2913.58 R9.1@2736.57,2913.58 ; v2(2716.57,3003.58) 2697.91,3022.24 2645.23,3022.24 2571.57,2948.58
NTC2: C3.2 NTC2.2 R8.1 U1.33 | length 645.4
  Top Layer w10: v2(2658.45,2990.34) 2658.45,3125.46 NTC2.2@2711.57,3178.58 ; U1.33@2851.41,2921.46 2851.41,2988.43 v2(2851.45,2988.46)
  Bottom Layer w10: v2(2658.45,2990.34) 2651.57,2983.46 R8.1@2651.57,2913.58 2680.19,2942.21 2760.77,2942.21 2789.39,2913.58 C3.2@2816.57,2913.58 2841.26,2938.27 2841.26,2988.9 2845.94,2993.58 2851.06,2988.46 v2(2851.45,2988.46)
POWER: U3.18/A4 U8.7 | length 1275.5
  Top Layer w10: U3.18/A4@3410,2170 3649.41,1930.59 3926.32,1930.59 3945.73,1950 4390,1950 4485,1855 U8.7@4538.9,1855
POWER_GATE: Q21.2 U8.14 | length 877.9
  Top Layer w10: v1(4600,1400) 4600,1500 4615.47,1515.47 4615.47,1515.62 4755.76,1655.91 4955.13,1655.91 4990,1690.78 4990,1820 4955,1855 U8.14@4901.1,1855
  Bottom Layer w10: v1(4600,1400) 4600,1324.51 Q21.2@4600.49,1325
POWER_LED: LED.1 Q20.2 | length 325.6
  Top Layer w10: Q20.2@3520,1186 3564,1186 v1(3570,1180)
  Bottom Layer w10: v1(3570,1180) 3730,1180 LED.1@3810,1260
POWER_SWITCH_NC: R62.1 R64.2 U3.19/A5 | length 915.3
  Top Layer w10: U3.19/A5@3310,2170 3460,2020 3460,1490 v1(3490,1460)
  Bottom Layer w10: v1(3490,1460) 3500,1450 3500,1417.56 3510,1407.56 R62.1@3580,1407.56
PRECHARGE: Q23.1 U8.16 | length 2700.4
  Top Layer w10: U8.16@4901.1,1955 4985,1955 5054.09,1885.91 5054.09,1513.41 5168.41,1399.09 5800.91,1399.09 v2(5810,1390) ; v2(5810.19,1468) 5810.19,1491.91 5858.28,1540 6660,1540 v1(6710,1590)
  Bottom Layer w10: v2(5810,1390) v2@5810,1450 ; Q23.1@6694.37,1887.4 6723.28,1858.5 6723.28,1603.28 v1(6710,1590)
PRECHARGE_SWITCH: U3.22/A8 U8.5 | length 1618
  Top Layer w10: v1(4400,1990) 4410,1990 4445,1955 U8.5@4538.9,1955
  Bottom Layer w10: U3.22/A8@3010,2170 3160,2020 3950,2020 3980,1990 v1(4400,1990)
SCKI: R1.2 U1.41 U3.14/A0 U6.6 | length 7627.3
  Top Layer w10: U1.41@2693.93,2921.46 2693.93,2810.95 v2(2686.57,2803.58) 2686.57,2762.26 2538.09,2613.79 v2(2538.09,2570) 2520,2551.91 2520,2290 2583.31,2226.69 3753.31,2226.69 U3.14/A0@3810,2170 ; v2(6630,2500) 6671.59,2458.41 6671.59,2402.7 6684.54,2389.76 6688.33,2389.76 6688.25,2389.68 U6.6@6712.62,2389.68
  Bottom Layer w10: v2(2538.09,2570) 2538.09,2571.91 2482.85,2627.15 2482.85,3175.35 2623.41,3315.91 5643.4,3315.91 5667.02,3292.28 5732.98,3292.28 5747.51,3306.81 6223.21,3306.81 6535.91,2994.12 6535.91,2588.97 6576.78,2548.09 6627.44,2497.44 v2(6630,2500)
SDI: R2.2 U1.42 U3.11 U6.0 | length 8167.2
  Top Layer w10: U1.42@2674.25,2921.46 2674.25,2856.26 v2(2621.57,2803.58) 2621.57,2719.76 2500,2598.19 2500,2250 v2(2530,2220) 2530,2194.27 2974.16,1750.11 v1(3311.93,1750.11) ; v1(3590,1750) 3630,1750 U3.11@3810,1570 ; v2(6520,2460) 6527.38,2452.62 U6.0@6527.38,2410.16
  Bottom Layer w10: v2(2530,2220) 2530,2510 2570,2550 2570,2600 2498.76,2671.24 2498.76,3168.76 2630,3300 5636.81,3300 5660.43,3276.38 5739.57,3276.38 5754.1,3290.91 6216.63,3290.91 6520,2987.53 v2(6520,2460) ; R2.2@2616.57,2781.14 2621.57,2786.14 v2(2621.57,2803.58) ; v1(3311.93,1750.11) 3589.89,1750.11 v1(3590,1750)
SDO: R6.2 U1.43 U3.12 U6.8 | length 9590.2
  Top Layer w10: v1(2510,2098.16) 2484.09,2124.07 2484.09,2604.78 2589.66,2710.35 2589.66,2816.8 2654.56,2881.7 U1.43@2654.56,2921.46 ; v2(6640,2300) 6640,2310 6680.31,2350.31 U6.8@6712.62,2350.31
  Bottom Layer w10: R6.2@3800,1652.44 3882.44,1570 U3.12@3910,1570 3844.09,1504.09 2555.91,1504.09 2474.09,1585.91 2474.09,2044.87 2510,2080.78 v1(2510,2098.16) 2510,2098.81 2518.16,2106.97 2435.14,2190 2435.14,3200.12 2598.63,3363.62 5663.16,3363.62 5686.78,3340 5713.22,3340 5727.74,3354.53 6242.98,3354.53 6727.81,2869.7 6727.81,2391.48 6713.45,2377.13 6610.8,2377.13 6604.41,2370.74 6604.41,2326.27 6630.68,2300 v2(6640,2300)
V-: C2.1 R4.2 U1.30 | length 1020.8
  Top Layer w10: U1.30@2910.47,2918.65 2910.47,2886.28 2943.16,2853.58 v2(3021.57,2853.58)
  Bottom Layer w10: C2.1@2576.57,2281.02 2759.01,2281.02 2851.57,2373.58 2851.57,2448.58 2971.57,2568.58 R4.2@2971.57,2726.02 2971.57,2734.22 3021.57,2784.22 v2(3021.57,2853.58)
VBB: Q13.8 Q14.8 Q19.3 Q23.2 R7.1 R60.2 U5.3 U7.20 | length 2110.4
  Top Layer w10: U7.20@5498.27,1541.73 5498.27,1511.73 v2(5500,1510) ; R7.1@6265,2462.5 6265,2662.2 U5.3@6535.35,2662.2
  Bottom Layer w10: R60.2@5447.56,1380 5500,1432.44 v2(5500,1510) 5510,1500 5760,1500 6180,1920 v1(6180,2130)
  Bottom Layer w20: Q23.2@6611,1850 v1(6611,2009) ; v1(6611,2009) v1(6570.5,2049.5) v1(6530,2090) v1(6611,2009)
  other v1: 6100,2350 6150,2350 6200,2350 6100,2400 6150,2400 6200,2400 6100,2450 6150,2450 6200,2450
VCC: C22.2 C23.2 C24.2 C25.2 C26.2 C30.1 C31.1 C43.2 R6.1 U3.3.3V U4.2 U6.2 | length 9184.3
  Top Layer w10: U6.2@6527.38,2370 6585.95,2370 6620,2404.05 v2(6620,2410)
  Bottom Layer w10: U3.3.3V@2810,2170 2790,2150 C25.2@2790,2081.5 ; v1(4350,1590) 4350,1588.5 C30.1@4321.5,1560 4310,1548.5 U4.2@4310,1430.08 U4.2@4310,1189.92 4270.08,1150 4030,1150 3980,1200 3980,1570 3930,1620 3887.56,1620 R6.1@3800,1707.56 3657.56,1850 3190,1850 2960,2080 2931.5,2080 C23.2@2930,2081.5 C24.2@2860,2081.5 C25.2@2790,2081.5 ; C43.2@6640,2415.43 6695,2415.43 6711.91,2432.34 6711.91,2863.11 6236.39,3338.62 5734.33,3338.62 5719.8,3324.09 5680.2,3324.09 5656.57,3347.72 2605.22,3347.72 2451.04,3193.54 2451.04,2216.46 2586.01,2081.5 C26.2@2720,2081.5 C25.2@2790,2081.5
VDD: C18.2 C19.1 C44.1 L1.1 Q21.1 Q24.2 SWITCH.2 U2.3 U2.14 U8.11 U8.15 U8.17 U8.19 U8.20 | length 6711.4
  Top Layer w10: L1.1@2727.44,2433.58 2727.44,2363.58 2841.02,2250 4560,2250 4650,2160 ; SWITCH.2@3810,1410 3840,1410 3952.19,1522.19 3952.19,1802.19 v2(4020,1870) 4210,1870 4250,1830 v1@4250,1750 ; v2(4000,1730) 4039.53,1769.53 U2.3@4085.08,1769.53 ; U2.14@4194.92,1769.53 v1(4250,1769.53) ; C44.1@4302.52,2090 4302.52,2122.52 4430,2250 ; v1(4500,1370) 4500,1550 4650,1700 ; U8.11@4901.1,1705 4896.1,1700 4650,1700 ; U8.15@4901.1,1905 4655,1905 4650,1900 ; U8.17@4901.1,2005 4650,2005 ; U8.19@4901.1,2105 4655,2105 4650,2110 ; U8.20@4901.1,2155 4896.1,2160 4650,2160 ; 4650,1700 4650,1900 ; 4650,1900 4650,2005 ; 4650,2005 4650,2110 ; 4650,2110 4650,2160
  Bottom Layer w10: v2(4000,1730) 4000,1850 v2(4020,1870) ; v1(4250,1769.53) 4250,1752.99 C18.2@4280,1782.99 4282.44,1785.43 C19.1@4400,1785.43 4460,1725.43 4460,1410 v1(4500,1370) 4660,1530 Q24.2@4666,1530
  Bottom Layer w20: v1(4500,1370) 4500,1368.47 4593.47,1275 Q21.1@4600.49,1275 Q21.1@4600.49,1225 Q21.1@4600.49,1175
VOUT: C33.1 C39.2 C41.2 D4.1 Q17.3 Q21.3 Q24.3 R57.2 R58.2 R61.2 R67.2 SWITCH.3 | length 6538.2
  Top Layer w10: R57.2@5670,1464.88 C39.2@5726.69,1464.88 5770,1508.19 v2(5770,1620)
  Top Layer w50: C33.1@5663.54,3130 v1(5760,3130) v1(5800,3090)
  Bottom Layer w10: SWITCH.3@3910,1410 3960,1360 3960,1180 4020,1120 4744.51,1120 Q21.3@4799.51,1175 ; Q24.3@4749.37,1492 4749.37,1240.63 4760,1230 4794.51,1230 Q21.3@4799.51,1225 ; Q21.3@4799.51,1325 4799.51,1341.95 R67.2@4850,1392.44 ; R58.2@5687.56,1627.56 v2@5770,1627.56 ; v2@5787.56,1627.56 6080,1920 6080,2180 6030,2230 5960.79,2230 5869.09,2321.7 5869.09,2509.09 6020,2660 R61.2@6020,2728.58 R61.2@6020,2711.53 ; D4.1@5837.01,2600 5837.01,2702.5 Q17.3@5899.51,2765
  Bottom Layer w20: Q21.3@4799.51,1175 4871.32,1103.19 5226.56,1103.19 5602.47,1479.09 5769.09,1479.09 6250,1960 6250,2481.53 R61.2@6020,2711.53
  Bottom Layer w50: v1@5801.49,3091.49 5850.91,3045.43 5850.91,2876.61
VREF: C27.2 U5.6 U6.4 | length 564
  Top Layer w10: U6.4@6527.38,2329.84 6584.96,2329.84 6651.91,2396.78 6651.91,2423.22 6598.09,2477.03 6598.09,2538.09 6650,2590 v2(6650,2610) 6650,2640 6672.2,2662.2 U5.6@6704.65,2662.2
  Bottom Layer w10: C27.2@6620,2658.5 6620,2640 v2(6650,2610)
VREG: C4.2 R1.1 R2.1 R3.1 R11.1 R12.1 R13.1 U1.35 U1.36 U1.40 | length 1504.6
  Top Layer w10: U1.40@2713.62,2921.46 2713.62,2956.63 2728.66,2971.68 2729.79,2971.68 2748.48,2990.37 2748.48,2991.49 2795.57,3038.58 v2(2806.69,3038.58) 2803.64,3035.53 2803.64,2968.66 2812.04,2960.25 U1.35@2812.04,2921.46 ; U1.36@2792.36,2921.46 v2@2792.36,3024.25
  Bottom Layer w10: R12.1@2896.57,2726.02 R13.1@2826.57,2726.02 R11.1@2756.57,2726.02 R1.1@2686.57,2726.02 R2.1@2616.57,2726.02 2614.13,2728.46 R3.1@2546.57,2728.46 2514.66,2760.37 2514.66,2976.68 2573.48,3035.49 2635.98,3035.49 2638.64,3038.15 2807.12,3038.15 v2(2806.69,3038.58) 2846.45,3038.58 2901.57,2983.46 C4.2@2901.57,2915.08
pads on no net: D20.2 U1.1 U1.2 U1.3 U2.2 U2.4 U2.5 U2.11 U2.13 U2.15 U2.16 U3.3.3V1 U3.13 U3.15/A1 U3.23/A9 U3.AGND U3.GND1 U3.PGM U3.RESET U3.VBAT U3.VIN U5.8 U7.15 U7.16 U7.25 U8.2 U8.4 U8.6 U8.8 U8.9 U8.12 U8.13

## Polygon pours and split planes (outlines as drawn)
GND on Top Layer "GND_L01_P010" (solid, remove dead copper, pour order 10): 2410,3240 2580,3410 6620,3410 6780,3250 6780,1220 6630,1070 2540,1070 2410,1200
GND on Bottom Layer "GND_L02_P014" (solid, remove dead copper, pour order 14): 2410,3240 2580,3410 6620,3410 6780,3250 6780,1220 6630,1070 2540,1070 2410,1200

## Keep-outs
Keep-Out Layer:
  the board outline again, w7.87

## Other copper
Top Layer:
  region net L+: 6725,1245 6725,1510 6380,1510 6380,1335 6320,1335 6320,1510 5890,1510 5890,1221.62 5981.62,1130 6610,1130
  region net VBB: 6070,2060 6070,2560 6100,2590 6440,2590 6460,2570 6460,2330 6715,2075 6715,1650 5800,1650 5800,2000 6010,2000
  region net B+: 6070,2790 6100,2760 6430,2760 6460,2790 6460,2930 6680,3150 6680,3290 6600,3370 6430,3370 6070,3010
  region net GND: 5940,3370 5850,3280 5850,3080 5890,3040 6060,3040 6240,3220 6240,3330 6200,3370
  region net GND: 5300,1380 5780,1380 5780,1180 5730,1130 5350,1130 5300,1180
  region net C+: 5000,1380 5270,1380 5270,1180 5220,1130 5050,1130 5000,1180
  region net C+: 4660.37,1510 4740,1510 4870,1380 5010,1380 5010,1310 4830,1310 4755,1385 4659.6,1385
Bottom Layer:
  region net GND: 5750,1390 5790,1350 5790,1190 5720,1120 5330,1120 5330,1160 5560,1390
  region net GND: 5830,3130 5890,3070 6090,3070 6237.57,3217.57 6211.72,3280 5850,3280 5830,3260
  region net NetQ19_3: 5960,2580 5880,2500 5880,2430 5940,2430 5940,2480 5970,2510 6030,2510 6030,2450 6020,2440 5950,2440 5940,2440 5940,2430 5880,2430 5880,2390 5960,2310 6050,2310 6050,2480 6080,2510 6080,2580
  region net VOUT: 6080,2690 6080,2740 5930,2890 5770,2890 5770,2690
  region net GND: 5540,1910 5540,1990 5470,1990 5430,1950 5430,1930 5450,1910
  region net NetC40_2: 5730,2700 5730,2830 5680,2830 5630,2880 5480,2880 5480,2700
  region net NetQ15_2: 5390,1930 5320,1930 5320,2140 5390,2210 5560,2210 5560,2030 5410,2030 5390,2010
  region net NetC34_1: 5870,2210 5980,2210 6020,2170 6020,1940 5990,1910 5600,1910 5600,1990 5910,1990 5930,2010 5930,2070 5920,2080 5870,2080
  region net L+: 6580,1505 6710,1505 6710,1320 6695,1305 6595,1305 6580,1320
  region net C+: 5000,1210 5000,1380 5140,1380 5140,1210 5120,1190 5020,1190
  region net NetC32_2: 5590,2080 5590,2240 5830,2240 5830,2033.39 5670,2033.39 5670,2050 5640,2080
  region net C+: 5000,1850 5000,1930 5080,2010 5280,2010 5280,1930 5190,1930 5140,1880 5140,1850

## Silkscreen, mask and mechanical layers (free items; w line width, h text height)
Top Overlay:
  text "GND" at 5750,3320 h40
  text "B+" at 6260,3295 h60
  text "GND" at 5840,1210 h40 r90
  text "L+" at 5830,1120 h60
  text "C+" at 4910,1110 h60
Bottom Overlay:
  text "BMS v2.0 - Raphael Chang" at 3541.57,3313.58 h40